# Altium PCB node_simple.PcbDoc
Units mil, origin at the board's own origin, x right, y up, seen from the top; angles counter-clockwise.
Board outline 1470 x 900 mil, 2 copper layers (Top Layer, Bottom Layer); 11 components, 6 nets, 32 pads, 0 vias.
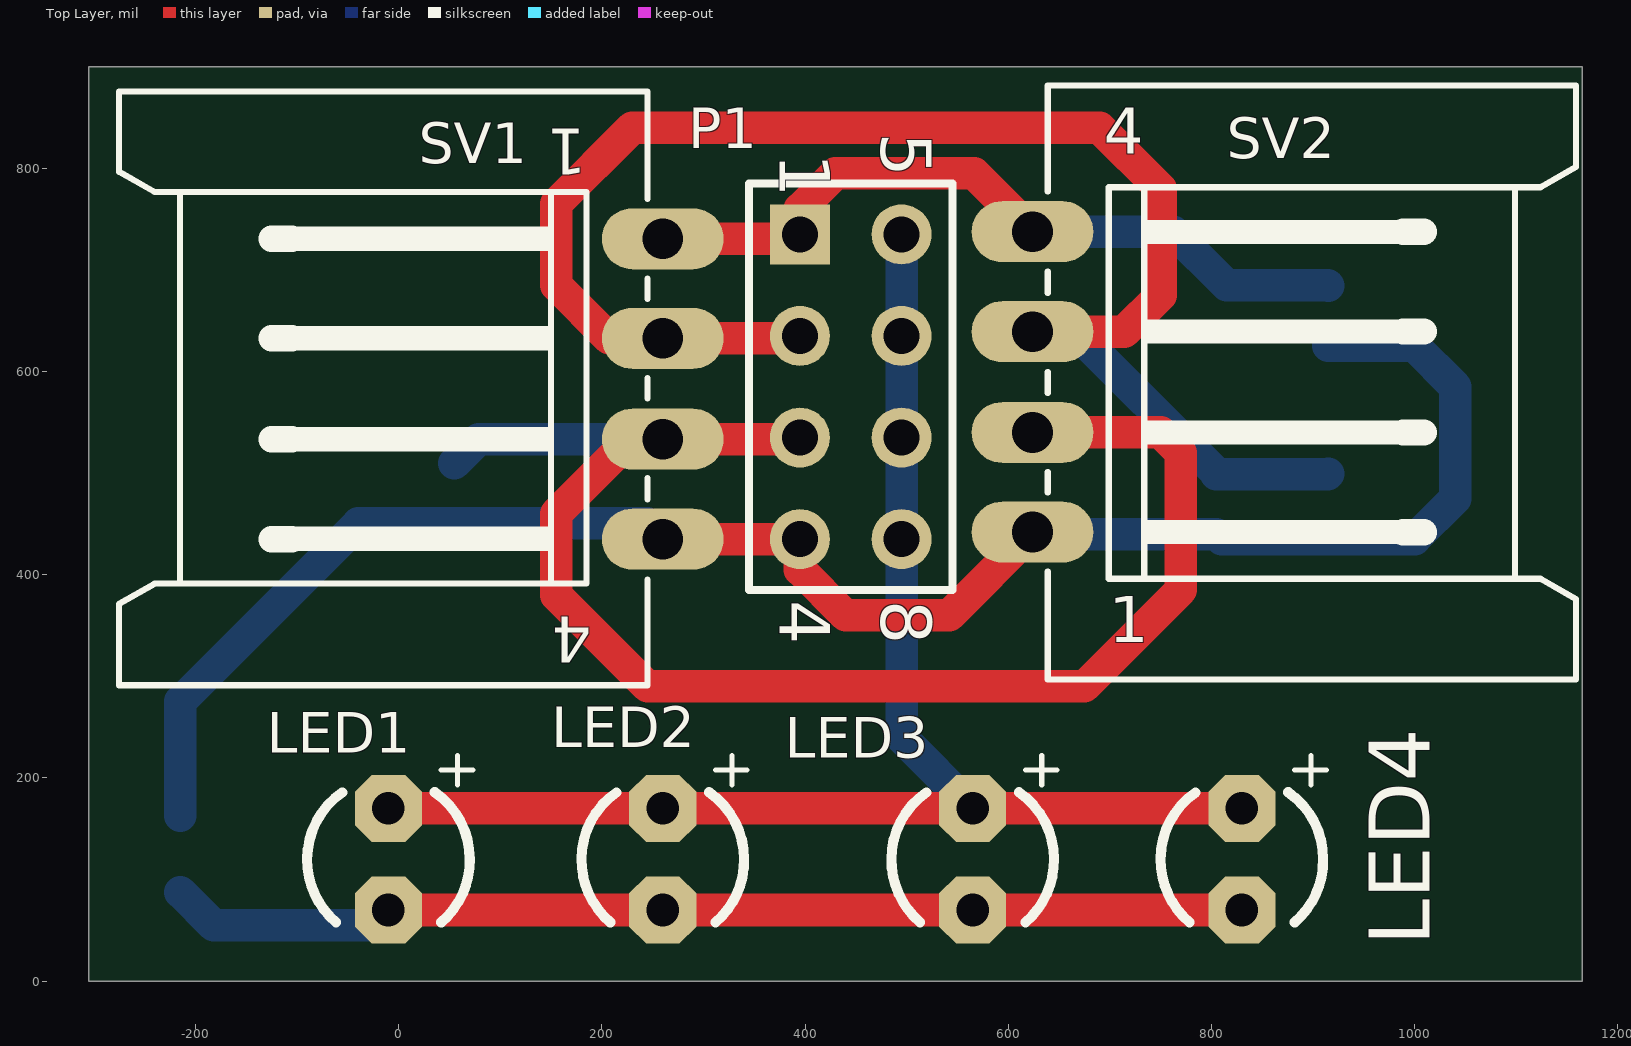
[diagram p0: Top Layer view]
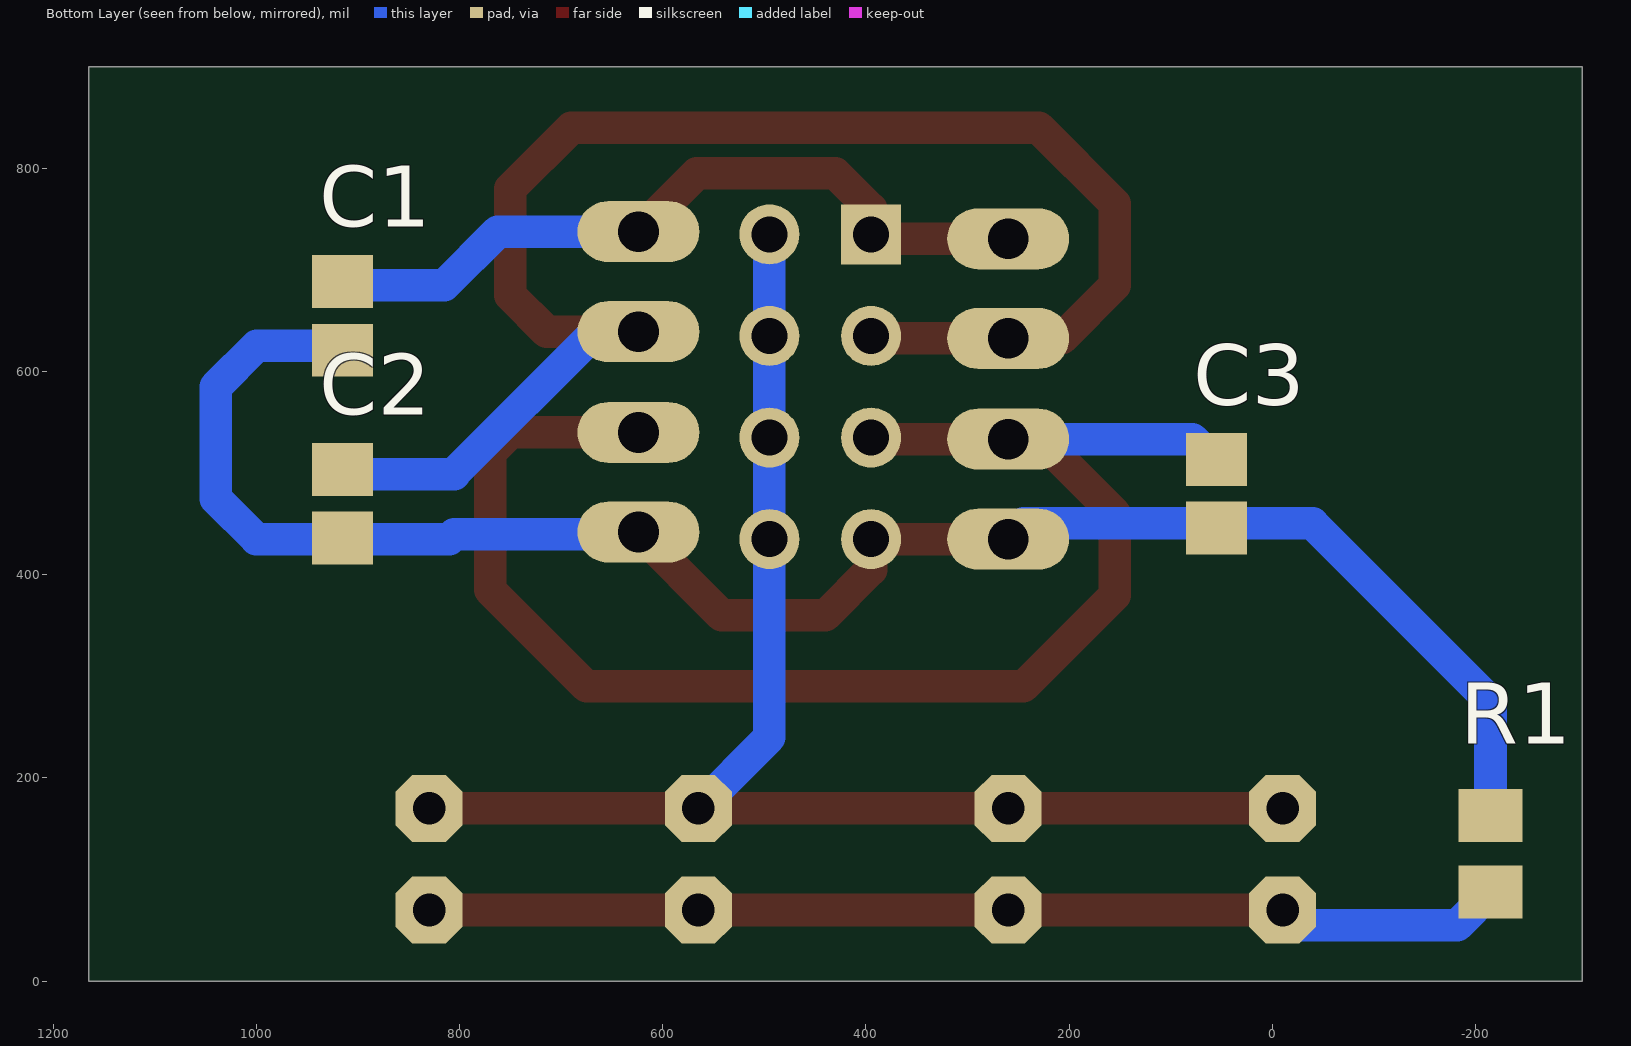
[diagram p1: Bottom Layer view, seen from below]

## Layer stack, top to bottom
Top Solder: solder mask 0.4, Solder Resist, Dk 3.5
Top Layer: signal copper 1.4
Dielectric 1: dielectric 12.6, FR-4, Dk 4.8
Bottom Layer: signal copper 1.4
Bottom Solder: solder mask 0.4, Solder Resist, Dk 3.5

## Board outline
-305,0 1165,0 1165,270.95 1165,621.78 1165,900 0,900 -305,900

## Design rules (kind name [scope] priority, off if disabled: settings)
Clearance [All] p1: gap=10
PolygonConnect [All] p1: connectstyle=Relief reliefconductorwidth=10 reliefentries=4 polygonreliefangle="90 Angle" airgapwidth=10
RoutingVias [All] p1: holewidth=28 width=50 viastyle="Through Hole" minholewidth=28 minwidth=50 maxholewidth=28 maxwidth=50
SolderMaskExpansion [All] p1: expansion=4
UnpouredPolygon [All] p1: allowunpoured=FALSE
Width [All] p1: maxlimit=50 minlimit=32 preferedwidth=45
29 further rules are at their usual default settings.

## Components (designator, comment, footprint, x,y, rotation, side; value= is the part's Value field where it differs from the comment)
C1 "Cap Pol3" C0805 915,655 r270 bottom
C2 "Cap Pol3" C0805 915,470 r270 bottom
C3 "Cap Pol3" C0805 55,480 r270 bottom
LED1 "3mmLED" led3mm -10,120 r270 top
LED2 "3mmLED" led3mm 260,120 r270 top
LED3 "3mmLED" led3mm 565,120 r270 top
LED4 "3mmLED" led3mm 830,120 r270 top
P1 "Header 4X2A" HDR2X4_CEN 395,735 r270 top
R1 "110" M0805 -215,125 r90 bottom
SV1 "IN_HD" L04P 13.94,582.64 r90 top
SV2 "OUT_HD" L04P 870,590 r270 top

## Footprints (in the part's own frame and the unit in brackets; to place one, negate y for a bottom-side part, rotate by r counter-clockwise, add the part's x,y. Pads: shape width x height; smd on the part's side, far side on the other; paste and mask are expansions set on the pad)
C0805 [mil]
  rect 52x60 smd: 1(-33.46,0) 2(34,0)
HDR2X4_CEN [mm] "Connector; Header; 4x2 Position"
  rect 1.5x1.5 hole 0.9: 1(0,0)
  round 1.5 hole 0.9: 2(2.54,0) 3(5.08,0) 4(7.62,0) 5(0,2.54) 6(2.54,2.54) 7(5.08,2.54) 8(7.62,2.54)
  silkscreen extent -1.27,-1.27 8.89,3.81
L04P [mil]
  oval 60x120 hole 40: 1(148,-246.06) 2(50,-246.06) 3(-49.21,-246.06) 4(-147.64,-246.06)
  silkscreen extent -291,-231 293,289
led3mm [mil]
  oct 66x66 hole 32: A(-50,0) K(50,0)
  silkscreen extent -102,-80 62,83
M0805 [mil]
  rect 52x63 smd: 1(-37.4,0.3) 2(38,0.3)

## Part data
C1 C2 C3: "Polarized Capacitor (Surface Mount)"
LED1 LED2 LED3 LED4: library part LED3MM
P1: "Header, 4-Pin, Dual row"
R1: library part R-US_M0805, "R-M0805"
SV1 SV2: library part L04P

## Nets (pads, with @x,y where several pads share a name; then routed paths per layer and width w, separated by ;. In a path a pad name is that pad's centre, name@x,y a point inside that pad or via, vN(x,y) a via of type N, cw(c..) or ccw(c..) an arc to the next point about the centre after c; other vN are vias at no path point)
GND: C1.2 C2.2 C3.2 P1.4 R1.2 SV1.4 SV2.1 | length 1799.8
  Top Layer w32: SV1.4 P1.4 395,405 440,360 541.94,360 SV2.1
  Bottom Layer w32: R1.2 -214.7,275.3 -39.53,450.47 244.53,450.47 SV1.4 ; SV2.1 625.94,440 805,440 810,435 1000,435 1040,475 1040,585 999.53,625.47 C1.2@915,625.47
NetLED1_K: LED1.K LED2.K LED3.K LED4.K R1.1 | length 1064.4
  Top Layer w32: LED1.K LED2.K LED3.K LED4.K
  Bottom Layer w32: R1.1 -182.1,55 -25,55 LED1.K
VCC: LED1.A LED2.A LED3.A LED4.A P1.5 P1.6 P1.7 P1.8 | length 1434
  Top Layer w32: LED1.A LED2.A LED3.A LED4.A
  Bottom Layer w32: P1.5 P1.6 P1.7 P1.8 495,240 LED3.A
VCC1: C1.1 P1.1 SV1.1 SV2.4 | length 742.1
  Top Layer w32: SV1.1 390.64,730.64 P1.1 395,760 430,795 566.58,795 SV2.4
  Bottom Layer w32: SV2.4 762.36,737.64 815,685 914.53,685 C1.1@915,684.53
VCC2: C2.1 P1.2 SV1.2 SV2.3 | length 1589.3
  Top Layer w32: P1.2 392.64,632.64 SV1.2 207.36,632.64 155,685 155,765 230,840 690,840 750,780 750,675 714.21,639.21 SV2.3
  Bottom Layer w32: SV2.3 665.79,639.21 805,500 805,499.06 914.53,499.06 C2.1@915,499.53
VCC3: C3.1 P1.3 SV1.3 SV2.2 | length 1546.9
  Top Layer w32: P1.3 393.43,533.43 SV1.3 228.43,533.43 155,460 155,380 245,290 675,290 770,385 770,520 750,540 SV2.2
  Bottom Layer w32: C3.1@55,509.53 78.9,533.43 SV1.3

## Polygon pours and split planes (outlines as drawn)
GND on Top Layer "Control- GND" (solid, remove dead copper, shelved, pour order 2): 2640.42,498.12 2825,498.12 2825,-122.95 2825,-392.95 1355,-392.95 1355,-107.05 1355,498.12
GND on Bottom Layer "Control- GND" (solid, remove dead copper, shelved, pour order 4): 1595,907.5 2595,907.5 2760,907.5 2760,278.45 2760,7.5 1290,7.5 1290,292.5 1290,907.5

## Text inside footprints (layer, text, board x,y; h text height)
P1: Top Overlay "5" at 475,835 h50 r270; Top Overlay "1" at 375,815 h50 r270; Top Overlay "4" at 375,375 h50 r270; Top Overlay "8" at 475,375 h50 r270
SV1: Top Overlay "1" at 185,853.64 h77.5 r180; Top Overlay "4" at 190,373.28 h77.5 r180
SV2: Top Overlay "1" at 698.94,319 h77.5; Top Overlay "4" at 693.94,799.36 h77.5